# EAGLE board Oblig4 (EAGLE 9.6.2)
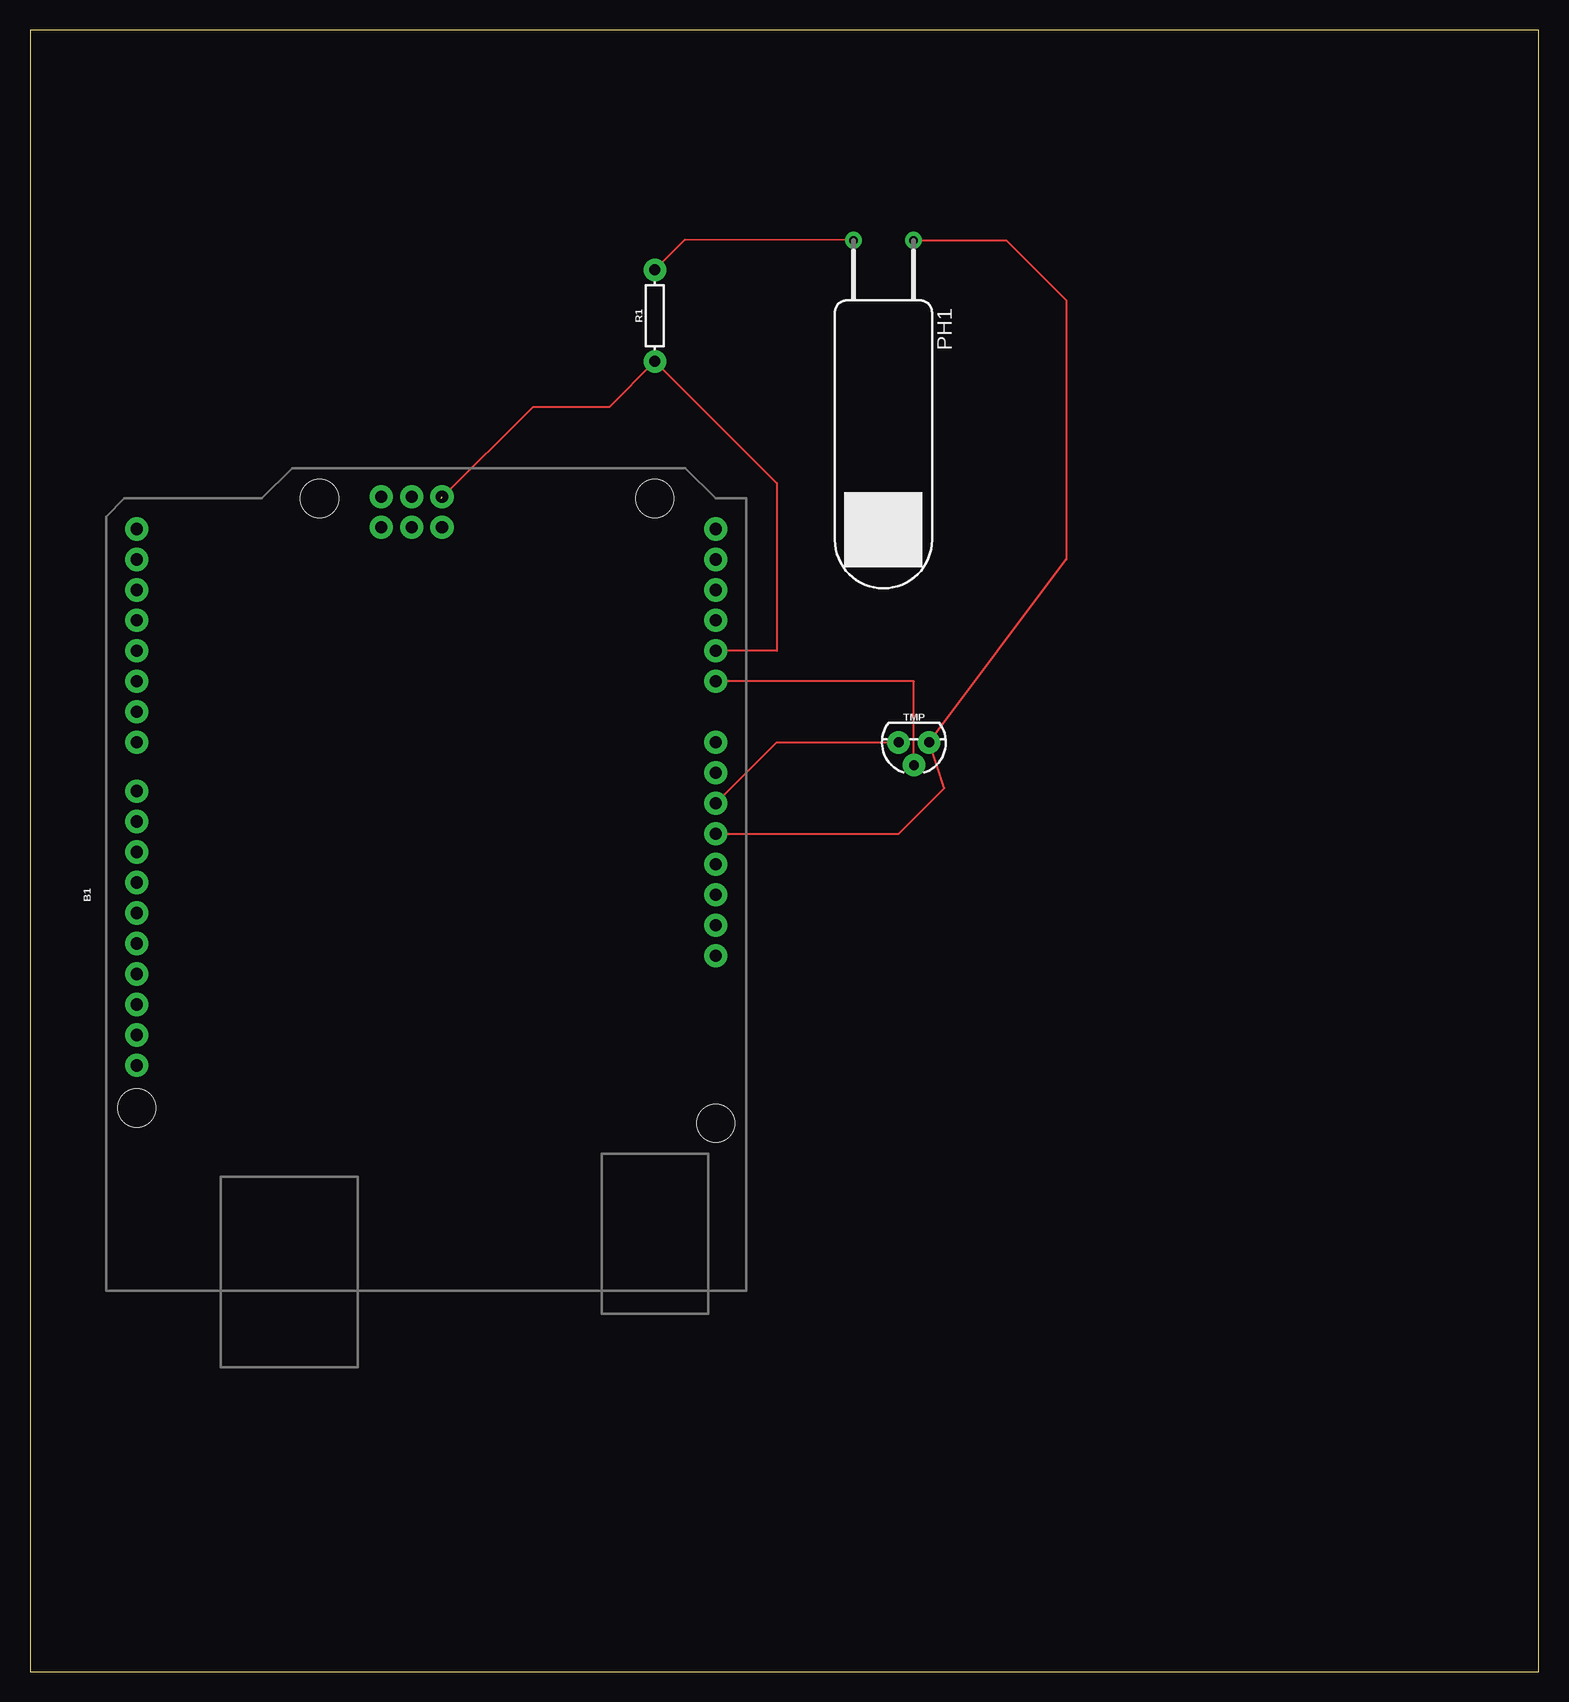
[diagram p0: board, top side]

Size 125.71 x 136.83 mm. Coordinates in mm from the lower left corner, seen from the top.
Outline: 0,0 125.71,0 125.71,136.83 0,136.83 0,0
Copper layers (1*16): Top 0.035mm / dielectric 1.5mm / Bottom 0.035mm
Design rules "default": minimum track width 6mil, minimum drill 0.35mm, track to track 6mil, track to pad 6mil, pad to pad 6mil, via to via 6mil, smd to smd 6mil, copper to edge 40mil, drill to drill 6mil, minimum pad ring 10mil, minimum via ring 8mil, stop-mask expansion 4mil, vias tented up to drill 0mil, thermal gap 10mil

## Footprints (pad centres in the part's own frame; a part is rotated, then mirrored left to right if it is on the bottom)
ARDUINO_R3 = drill 1.016 pad 1.93: 3.3V 2.54,-24.13; 5V 5.08,-24.13; A0 17.78,-24.13; A1 20.32,-24.13; A2 22.86,-24.13; A3 25.4,-24.13; A4 27.94,-24.13; A5 30.48,-24.13; AREF -9.144,24.13; D0 30.48,24.13; D1 27.94,24.13; D2 25.4,24.13; D3 22.86,24.13; D4 20.32,24.13; D5 17.78,24.13; D6 15.24,24.13; D7 12.7,24.13; D8 8.636,24.13; D9 6.096,24.13; D10 3.556,24.13; D11 1.016,24.13; D12 -1.524,24.13; D13 -4.064,24.13; GND@1 7.62,-24.13; GND@2 10.16,-24.13; GND@3 -6.604,24.13; GND@4 33.16,-1.32; IOREF -2.54,-24.13; MISO 30.62,3.76; MOSI 33.16,1.22; NC -5.08,-24.13; RESET@1 0,-24.13; RESET@2 30.62,-1.32; SCK 30.62,1.22; SCL -14.224,24.13; SDA -11.684,24.13; VCC 33.16,3.76; VIN 12.7,-24.13 | hole 3.175: -17.78,24.13; 33.02,8.89; 33.02,-19.05; -19.05,-24.13
D11XX_H = drill 0.7 pad 1.4: 1 -2.5,-5; 2 2.5,-5
AXIAL-0.3 = drill 0.9 pad 1.88: P$1 -3.81,0; P$2 3.81,0
TO-92 = drill 0.813 pad 1.88: 1 -1.27,0; 2 0,1.905; 3 1.27,0

## Placement (x,y rotation side)
B1  ARDUINO_UNO_R3  [ARDUINO_R3]  33.02,64.77 90 top
PH1  PHOTOCELLD11  [D11XX_H]  71.12,114.3 180 top
R1  220 OHM  [AXIAL-0.3]  52.07,113.03 90 top
TMP  [TO-92]  73.66,77.47 180 top

## Library data of the parts
B1 = SparkFun-Boards
PH1 = photo-elements
R1 = SparkFun-Resistors; PROD_ID: 220 OHM
TMP = SparkFun-Sensors; PROD_ID: IC-09880; SF_ID: SEN-10988

## Nets
N$1: PH1.2 R1.P$2
N$4: B1.5V PH1.1 TMP.1
S$1: B1.A1 B1.GND@4 R1.P$1
S$2: B1.A0 TMP.2
S$3: B1.GND@1 TMP.3

## Tracks (layer width: path | path; a pad name or v marks a point on that pad's centre or on a via)
N$1
  Top 0.152: PH1.2 54.57,119.34 R1.P$2
N$4
  Top 0.152: B1.5V 72.39,69.85 76.2,73.66 TMP.1 86.36,92.71 86.36,114.3 81.36,119.3 PH1.1
S$1  (1 unrouted)
  Top 0.152: B1.A1 62.23,85.09 62.23,99.06 R1.P$1 48.26,105.41 41.91,105.41 34.29,97.79
S$2
  Top 0.152: TMP.2 73.66,82.55 B1.A0
S$3
  Top 0.152: B1.GND@1 62.23,77.47 TMP.3